# Altium PCB PCB.PcbDoc
Units mm, origin at the board's own origin, x right, y up, seen from the top; angles counter-clockwise.
Board outline 152.4 x 101.6 mm, 2 copper layers (Top Layer, Bottom Layer); 40 components, 18 nets, 106 pads, 4 vias.
Unrouted connection lines stored in the file: 78.
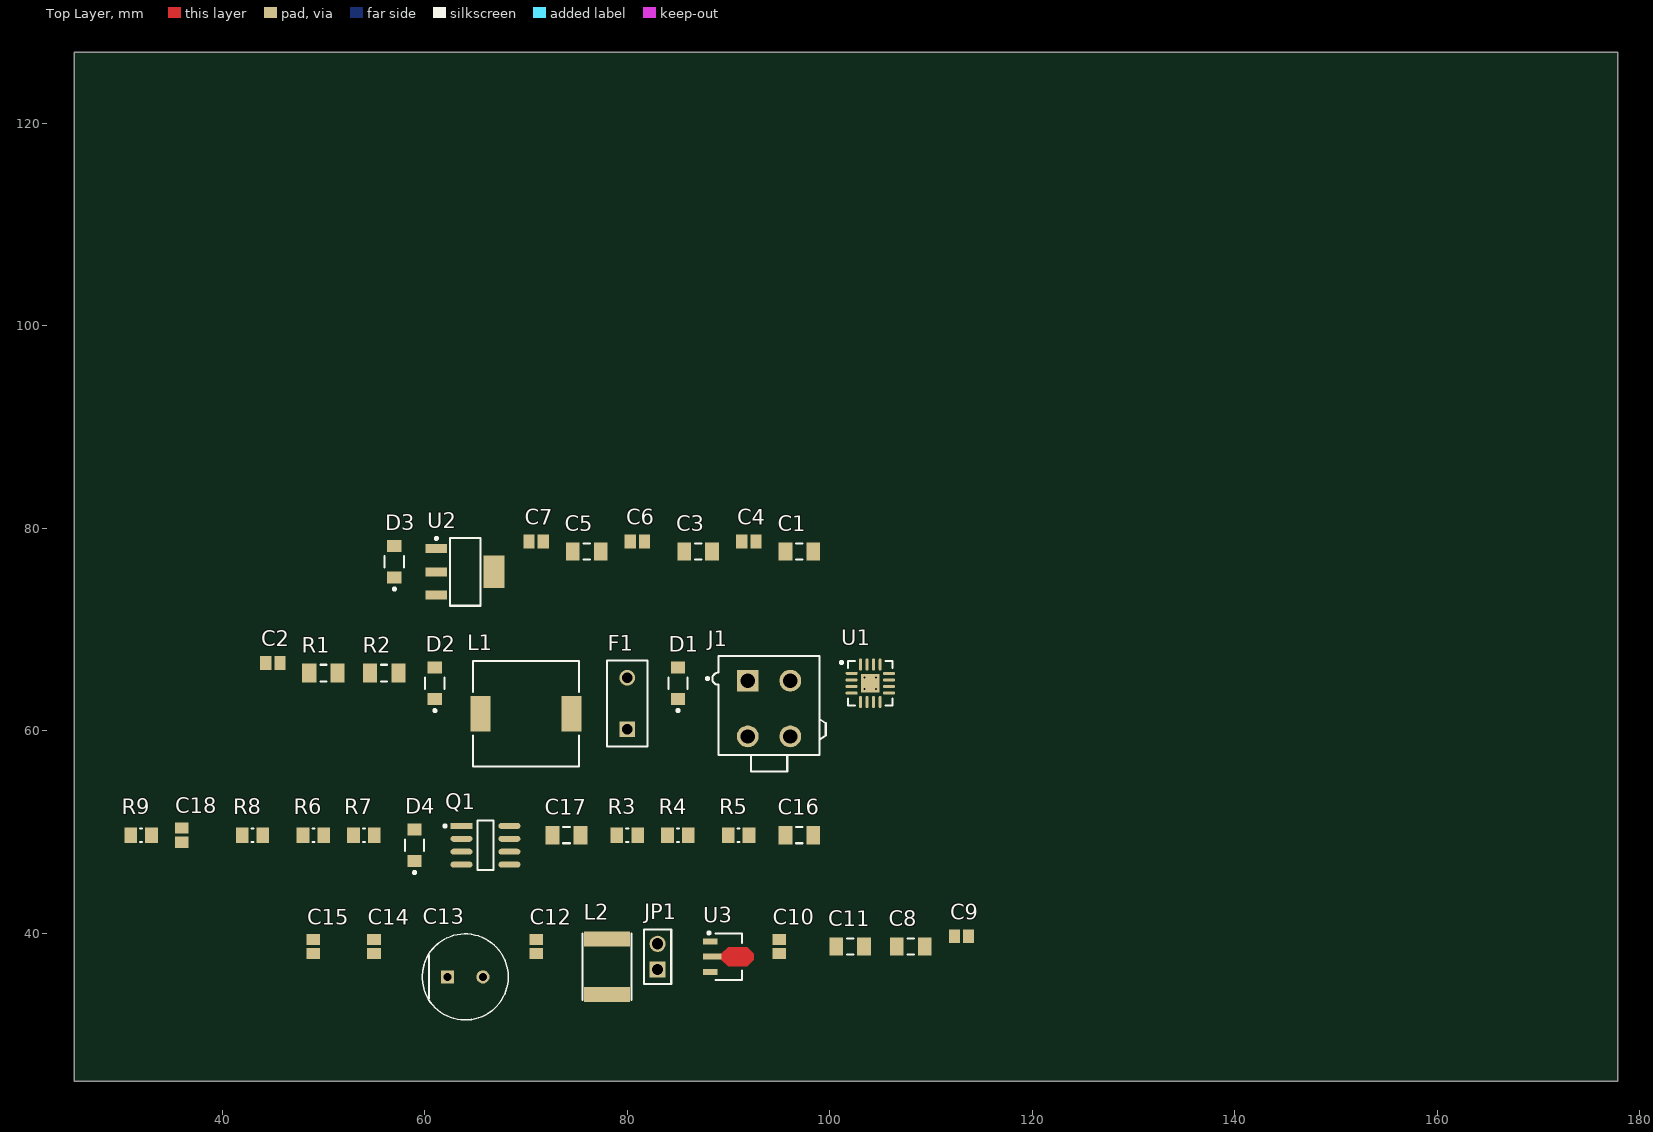
[diagram p0: Top Layer view]
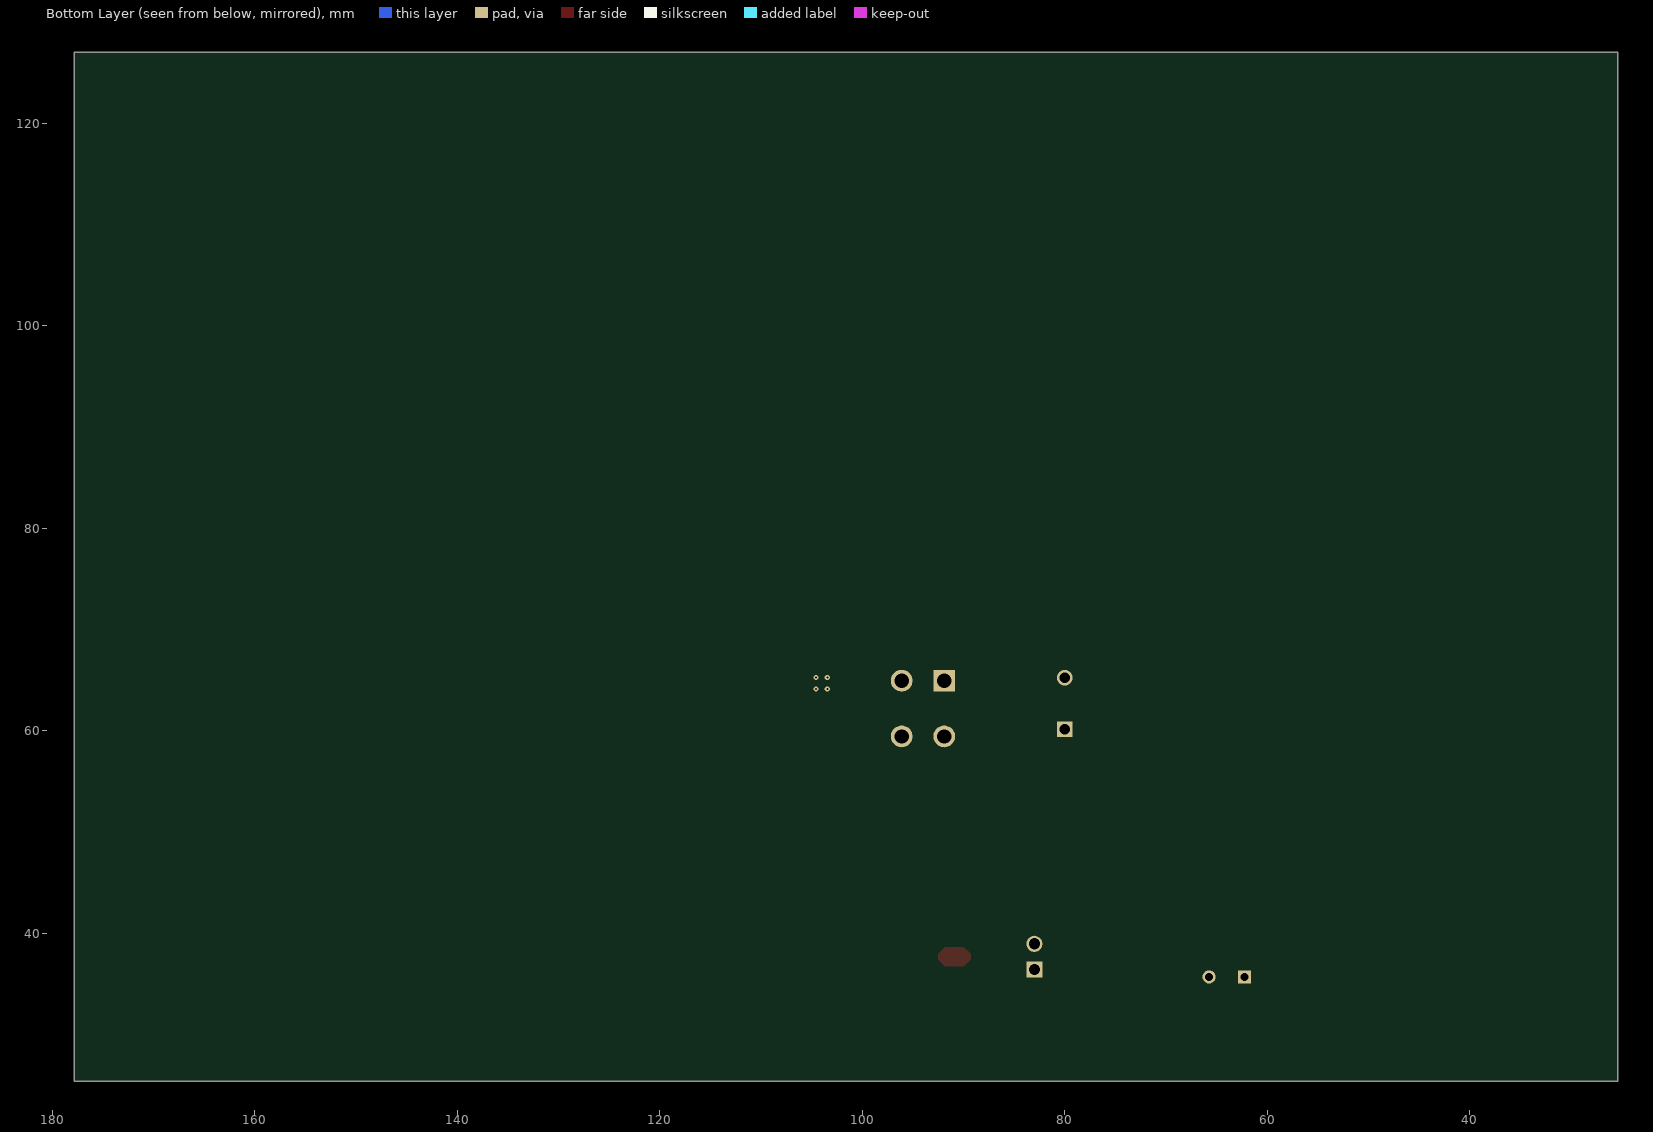
[diagram p1: Bottom Layer view, seen from below]

## Layer stack, top to bottom
Top Solder: solder mask 0.0102, Solder Resist, Dk 3.5
Top Layer: signal copper 0.0356
Dielectric 1: dielectric 0.32, FR-4, Dk 4.8
Bottom Layer: signal copper 0.0356
Bottom Solder: solder mask 0.0102, Solder Resist, Dk 3.5

## Board outline
25.4,25.4 177.8,25.4 177.8,127 25.4,127

## Design rules (kind name [scope] priority, off if disabled: settings)
Clearance [All] p1: gap=0.254 ignorepadtopadclearanceinfootprint=FALSE except(0: Arc-Hole Track-Hole SMDPad-Hole THPad-Hole Via-Hole Fill-Hole Poly-Hole Region-Hole Text-Hole)
PolygonConnect [All] p1: connectstyle=Relief reliefconductorwidth=0.254 reliefentries=4 polygonreliefangle="90 Angle" airgapwidth=0.254
RoutingVias [All] p1: holewidth=0.711 width=1.27 viastyle="Through Hole" minholewidth=0.711 minwidth=1.27 maxholewidth=0.711 maxwidth=1.27
SolderMaskExpansion [All] p1: expansion=0.102 istentingtop=FALSE
Width [All] p1: maxlimit=0.254 minlimit=0.254 preferedwidth=0.254
30 further rules are at their usual default settings.

## Components (designator, comment, footprint, x,y, rotation, side; value= is the part's Value field where it differs from the comment)
C1 "capacitor smd 1206 10uF" FP-GRM31-0_2-IPC_B 97,77.7 r0 top value=10uF
C2 "capacitor smd 0805 100nF" CAPC2013X140X50LL20T25 45,66.7 r0 top value=100nF
C3 "capacitor smd 1206 10uF" FP-GRM31-0_2-IPC_B 87,77.7 r0 top value=10uF
C4 "capacitor smd 0805 100nF" CAPC2013X140X50LL20T25 92,78.7 r0 top value=100nF
C5 "capacitor smd 1206 10uF" FP-GRM31-0_2-IPC_B 76,77.7 r0 top value=10uF
C6 "capacitor smd 0805 100nF" CAPC2013X140X50LL20T25 81,78.7 r0 top value=100nF
C7 "capacitor smd 0805 100nF" CAPC2013X140X50LL20T25 71,78.7 r0 top value=100nF
C8 "capacitor smd 1206 10uF" FP-GRM31-0_2-IPC_B 108,38.7 r0 top value=10uF
C9 "capacitor smd 0805 100nF" CAPC2013X140X50LL20T25 113,39.7 r0 top value=100nF
C10 "capacitor smd 0805 100nF" CAPC2013X140X50LL20T25 95,38.7 r90 top value=100nF
C11 "capacitor smd 1206 10uF" FP-GRM31-0_2-IPC_B 102,38.7 r0 top value=10uF
C12 "capacitor smd 0805 100nF" CAPC2013X140X50LL20T25 71,38.7 r90 top value=100nF
C13 "capacitor 270uF 16V" FP-OS-CON-TH-E12-d_0_6-MFG 64,35.7 r0 top value=270uF
C14 "capacitor smd 0805 100nF" CAPC2013X140X50LL20T25 55,38.7 r90 top value=100nF
C15 "capacitor smd 0805 100nF" CAPC2013X140X50LL20T25 49,38.7 r90 top value=100nF
C16 "capacitor smd 1206 10uF" FP-GRM31-0_2-IPC_B 97,49.7 r0 top value=10uF
C17 "capacitor smd 1206 10uF" FP-GRM31-0_2-IPC_B 74,49.7 r0 top value=1uF
C18 "capacitor smd 0805 100nF" CAPC2013X140X50LL20T25 36,49.7 r90 top value=100nF
D1 "diode SS34" FP-SS34LWH-MFG 85,64.7 r90 top
D2 "diode SS34" FP-SS34LWH-MFG 61,64.7 r90 top
D3 "diode SS34" FP-SS34LWH-MFG 57,76.7 r90 top
D4 "diode SS34" FP-SS34LWH-MFG 59,48.7 r90 top
F1 "fuse 392" FP-396-MFG 80,62.7 r90 top
J1 "4 pin MOLEX" FP-39-29-3046-MFG 94,61.7 r0 top
JP1 "header 2.54 2pin" 61300211121 83,37.7 r90 top
L1 "power inductor 220uH" "WE-PD 1050" 70,61.7 r0 top value=22uH
L2 "power inductor 470uH" WE-PD4-S 78,36.7 r90 top
Q1 "IRF7319" FP-PG-DSO-8-IPC_B 66,48.7 r0 top
R1 "resistor smd 1206 R100" RESC3216X89X51NL25T25 50,65.7 r0 top value=0.1R
R2 "resistor smd 1206 R100" RESC3216X89X51NL25T25 56,65.7 r0 top value=0.1R
R3 "resistor smd 0805 1K" RESC2013X50X30ML20T20 80,49.7 r0 top value=10K
R4 "resistor smd 0805 1K" RESC2013X50X30ML20T20 85,49.7 r0 top value=100K
R5 "resistor smd 0805 1K" RESC2013X50X30ML20T20 91,49.7 r0 top value=100K
R6 "resistor smd 0805 1K" RESC2013X50X30ML20T20 49,49.7 r0 top value=100K
R7 "resistor smd 0805 1K" RESC2013X50X30ML20T20 54,49.7 r0 top value=100K
R8 "resistor smd 0805 1K" RESC2013X50X30ML20T20 43,49.7 r0 top value=300K
R9 "resistor smd 0805 1K" RESC2013X50X30ML20T20 32,49.7 r0 top value=300K
U1 "TP5100" QFN65P400X400X90_HS-17M 104,64.7 r0 top
U2 "LD1117S33TR" SOT-223_L 64,75.7 r0 top
U3 "S-8353" SOT89-150P410X160-3N 90,37.7 r0 top

## Footprints (in the part's own frame and the unit in brackets; to place one, negate y for a bottom-side part, rotate by r counter-clockwise, add the part's x,y. Pads: shape width x height; smd on the part's side, far side on the other; paste and mask are expansions set on the pad)
61300211121 [mm] "Pin Header, pitch 2.54 mm, THT, Vertical, single row, 2p"
  rect 1.6x1.6 hole 1.1: 1(-1.27,0)
  round 1.6 hole 1.1: 2(1.27,0)
  silkscreen extent -2.69,-1.35 2.69,1.35, body extent -2.54,-1.27 2.54,1.27, height 8.57
CAPC2013X140X50LL20T25 [mm] "Chip Capacitor, 2-Leads, Body 2.00x1.25mm, IPC High Density"
  rect 1.1x1.35 smd: 1(-0.7,0) 2(0.7,0)
  body extent -1.1,-0.72 1.1,0.72, height 1.4
FP-39-29-3046-MFG [mm]
  rect 2.15x2.15 hole 1.4 paste-1000 mask+0: 1(-2.1,3.25)
  round 2.15 hole 1.4 paste-1000 mask+0: 2(2.1,3.25) 3(-2.1,-2.25) 4(2.1,-2.25)
  silkscreen extent -6.2,-5.7 5.6,5.7, body extent -5.7,-5.8 5.7,5.8, height 0.25
FP-396-MFG [mm]
  rect 1.55x1.55 hole 1 paste-1000 mask+0: 1(-2.54,0)
  round 1.55 hole 1 paste-1000 mask+0: 2(2.54,0)
  silkscreen extent -4.25,-2 4.25,2, body extent -4.35,-2.1 4.35,2.1, height 0.25
FP-GRM31-0_2-IPC_B [mm]
  rect 1.355x1.806 smd paste+0 mask+0: 1(-1.376,0) 2(1.376,0)
  silkscreen extent -0.32,-0.8 0.32,0.8, body extent -2.3,-1.15 2.3,1.15, height 0.25
FP-OS-CON-TH-E12-d_0_6-MFG [mm]
  rect 1.3x1.3 hole 0.8 paste-1000 mask+0: 1(-1.75,0)
  round 1.3 hole 0.8 paste-1000 mask+0: 2(1.75,0)
  silkscreen extent -4.25,-4.25 4.25,4.25, body extent -4.35,-4.35 4.35,4.35, height 0.25
FP-PG-DSO-8-IPC_B [mm]
  rect 2.174x0.583 smd paste+0 mask+0: 1(-2.366,1.905)
  rrect100% 2.174x0.583 smd paste+0 mask+0: 2(-2.366,0.635) 3(-2.366,-0.635) 4(-2.366,-1.905) 5(2.366,-1.905) 6(2.366,-0.635) 7(2.366,0.635) 8(2.366,1.905)
  silkscreen extent -4.13,-2.45 0.78,2.45, body extent -3.7,-2.7 3.7,2.7, height 0.25
FP-SS34LWH-MFG [mm]
  rect 1.2x1.4 smd paste+0 mask+0: 1(-1.55,0) 2(1.55,0)
  silkscreen extent -2.82,-0.95 0.58,0.95, body extent -2.25,-1.05 2.25,1.05, height 0.25
QFN65P400X400X90_HS-17M [mm] "QFN, 16-Leads, Body 4,00x4,00mm, Pitch 0,65mm, Thermal Pad 2,10x2,10mm, IPC Low Density"
  oval 1.2x0.3 smd: 1(-1.85,0.975) 2(-1.85,0.325) 3(-1.85,-0.325) 4(-1.85,-0.975) 9(1.85,-0.975) 10(1.85,-0.325) 11(1.85,0.325) 12(1.85,0.975)
  oval 0.3x1.2 smd: 5(-0.975,-1.85) 6(-0.325,-1.85) 7(0.325,-1.85) 8(0.975,-1.85) 13(0.975,1.85) 14(0.325,1.85) 15(-0.325,1.85) 16(-0.975,1.85)
  rect 1.8x1.8 smd: 17(0,0)
  silkscreen extent -2.97,-2.2 2.2,2.2, body extent -2.05,-2.05 2.05,2.05, height 0.9
RESC2013X50X30ML20T20 [mm] "Chip Resistor, 2-Leads, Body 2.00x1.25mm, IPC Low Density"
  rect 1.25x1.55 smd: 1(-1.025,0) 2(1.025,0)
  silkscreen extent -0.1,-0.67 0.1,0.67, body extent -1.1,-0.72 1.1,0.72, height 0.5
RESC3216X89X51NL25T25 [mm] "Chip Resistor, 2-Leads, Body 3.20x1.60mm, IPC Medium Density"
  rect 1.4x1.85 smd: 1(-1.4,0) 2(1.4,0)
  silkscreen extent -0.3,-0.82 0.3,0.82, body extent -1.73,-0.92 1.73,0.92, height 0.89
SOT89-150P410X160-3N [mm] "SOT89, 3-Leads, Body 4,50x2,45mm, Pitch 1,50mm, Lead Span 4,1mm, IPC Medium Density"
  rect 1.4x0.6 smd: 1(-1.8,1.5) 3(-1.8,-1.5)
  rect 1.8x0.6 smd: 2(-1.6,0)
  Top Layer region: -0.7,0.3 -0.05,0.95 1.85,0.95 2.5,0.3 2.5,-0.3 1.85,-0.95 -0.05,-0.95 -0.7,-0.3
  silkscreen extent -2.05,-2.3 1.32,2.47, body extent -1.28,-2.3 1.32,2.3, height 1.6
SOT-223_L [mm] "SOT223, 4-Leads, Body 6.5x3.5mm, Pitch 2.3mm, Lead Span 7mm, IPC High Density"
  rect 2.1x0.9 smd: 1(-2.85,2.3) 2(-2.85,0) 3(-2.85,-2.3)
  rect 2.1x3.2 smd: 4(2.85,0)
  silkscreen extent -2.97,-3.35 1.5,3.42, body extent -1.85,-3.35 1.85,3.35, height 1.8
WE-PD4-S [mm] "SMD Inductor, 2-Leads, Body 6.6 x 4.4 mm"
  rect 1.5x4.5 smd: 1(-2.73,0) 2(2.73,0)
  silkscreen extent -3.3,-2.41 3.3,2.41, body extent -3.3,-2.22 3.3,2.22, height 2.91
"WE-PD 1050" [mm] "SMD Inductor, 2-Leads, Body 10,0x10,0mm"
  rect 2x3.5 smd: 1(-4.5,0) 2(4.5,0)
  silkscreen extent -5.25,-5.2 5.25,5.2, body extent -5,-5 5,5, height 4.75

## Part data
C1 C3 C5 C8 C11 C16 C17: library part CMP-001-00086-1, "Multilayer Ceramic Capacitors MLCC - SMD/SMT 1206 10uF 50volt X5R +/-10%"
C2 C4 C6 C7 C9 C10 C12 C14 C15 C18: library part CMP-001-00085-1, "Cap Ceramic 0.1uF 50V X7R 10% Pad SMD 0805 FlexiTerm 125C Automotive T/R"
C13: library part CMP-001-00087-1, "Cap Aluminum Polymer 270uF 16VDC 20% (8 X 12mm) Radial 3.5mm 0.011 Ohm 5000mA 5000h 105C T/R"
D1 D2 D3 D4: library part CMP-004-00032-2, "Rectifier Diode Schottky 40V 3A Automotive 2-Pin SOD-123W T/R"
F1: library part CMP-005-00013-1, "Fuse Subminiature Slow Blow Acting 0.05A 125V Radial 8.5 X 4 X 8mm Bulk UL"
J1: library part CMP-002-00073-1, "Connector Wire to Board Header 4 Position 4.2mm Solder Straight Thru-Hole"
JP1: library part CMP-002-00072-1, "CONN HEADER 2 POS 2.54"
L1: library part CMP-006-00021-1, "Fixed Ind 22UH 1A 439 Mohm SMD"
L2: library part CMP-006-00022-2, "Surface Mount Power Inductor, We-Pd4 Series, 470 H, 20%, Unshielded, 6.8 Ohm, 160 Ma Rohs Compliant: Yes"
Q1: library part CMP-013-00034-1, "IRF7309PBF Dual N/P-channel MOSFET Transistor; 3 A; 4 A; 30 V; 8-Pin SOIC"
R1 R2: library part CMP-009-00178-1, "Res Metal Strip 1206 0.1 Ohm 1% 1/4W ±75ppm/°C Molded SMD SMD Embossed Plastic T/R"
R3 R4 R5 R6 R7 R8 R9: library part CMP-009-00179-1, "Res Thick Film 0805 1K Ohm 1% 1/8W ±100ppm/°C Molded SMD Paper T/R"
U1: library part CMP-019-00049-3, "2A-switch buck 8.4V / 4.2V rechargeable lithium battery Charger"
U2: library part CMP-019-00050-1, "IC REG LDO 3.3V 0.8A SOT223"
U3: library part CMP-019-00051-1

## Via types
v1: diameter 0.5, hole 0.2, Top Layer to Bottom Layer, 4 vias

## Nets (pads, with @x,y where several pads share a name; then routed paths per layer and width w, separated by ;. In a path a pad name is that pad's centre, name@x,y a point inside that pad or via, vN(x,y) a via of type N, cw(c..) or ccw(c..) an arc to the next point about the centre after c; other vN are vias at no path point)
+3V3: C10.2 C11.2 U2.2 U2.4
+5: C8.2 C9.2 U2.3
+5V: C12.2 C13.2 D3.1 U3.2
ADC_Battery: C18.2 R8.1 R9.2
BAT+: C5.2 C6.2 C15.2 J1.3 Q1.3 R1.1 R2.1 R3.2 R4.2 U1.9
GND: C1.1 C2.1 C3.1 C4.1 C5.1 C6.1 C7.1 C8.1 C9.1 C10.1 C11.1 C12.1 C13.1 C14.1 C18.1 D2.2 J1.2 J1.4 Q1.1 R9.1 U1.7 U1.11 U1.12 U2.1 U3.1
NetC1_2: C1.2 C2.2 D1.1 U1.1 U1.4 U1.5 U1.16
NetC3_2: C3.2 C4.2 L1.2 R1.2 R2.2 U1.8
NetC7_2: C7.2 U1.10
NetC15_1: C15.1 C17.1 Q1.4 Q1.8 R4.1
NetC16_1: C16.1 Q1.2 R6.1
NetD1_2: D1.2 F1.2
NetD2_1: D2.1 L1.1 U1.2 U1.3
NetD3_2: D3.2 L2.2 U3.3
NetD4_2: D4.2 R5.1 R6.2 R7.1
PowerButton: C17.2 D4.1 R3.1
PowerControl: R7.2
"Switched BAT+": C14.2 C16.2 L2.1 Q1.5 Q1.6 R5.2 R8.2
pads on no net: F1.1 J1.1 JP1.1 JP1.2 Q1.7 U1.6 U1.13 U1.14 U1.15 U1.17
copper on no net:
  other v1: 103.45,64.15 104.55,64.15 103.45,65.25 104.55,65.25